# Allegro board INSOLADORA_SOLDERMASK_TOP.brd
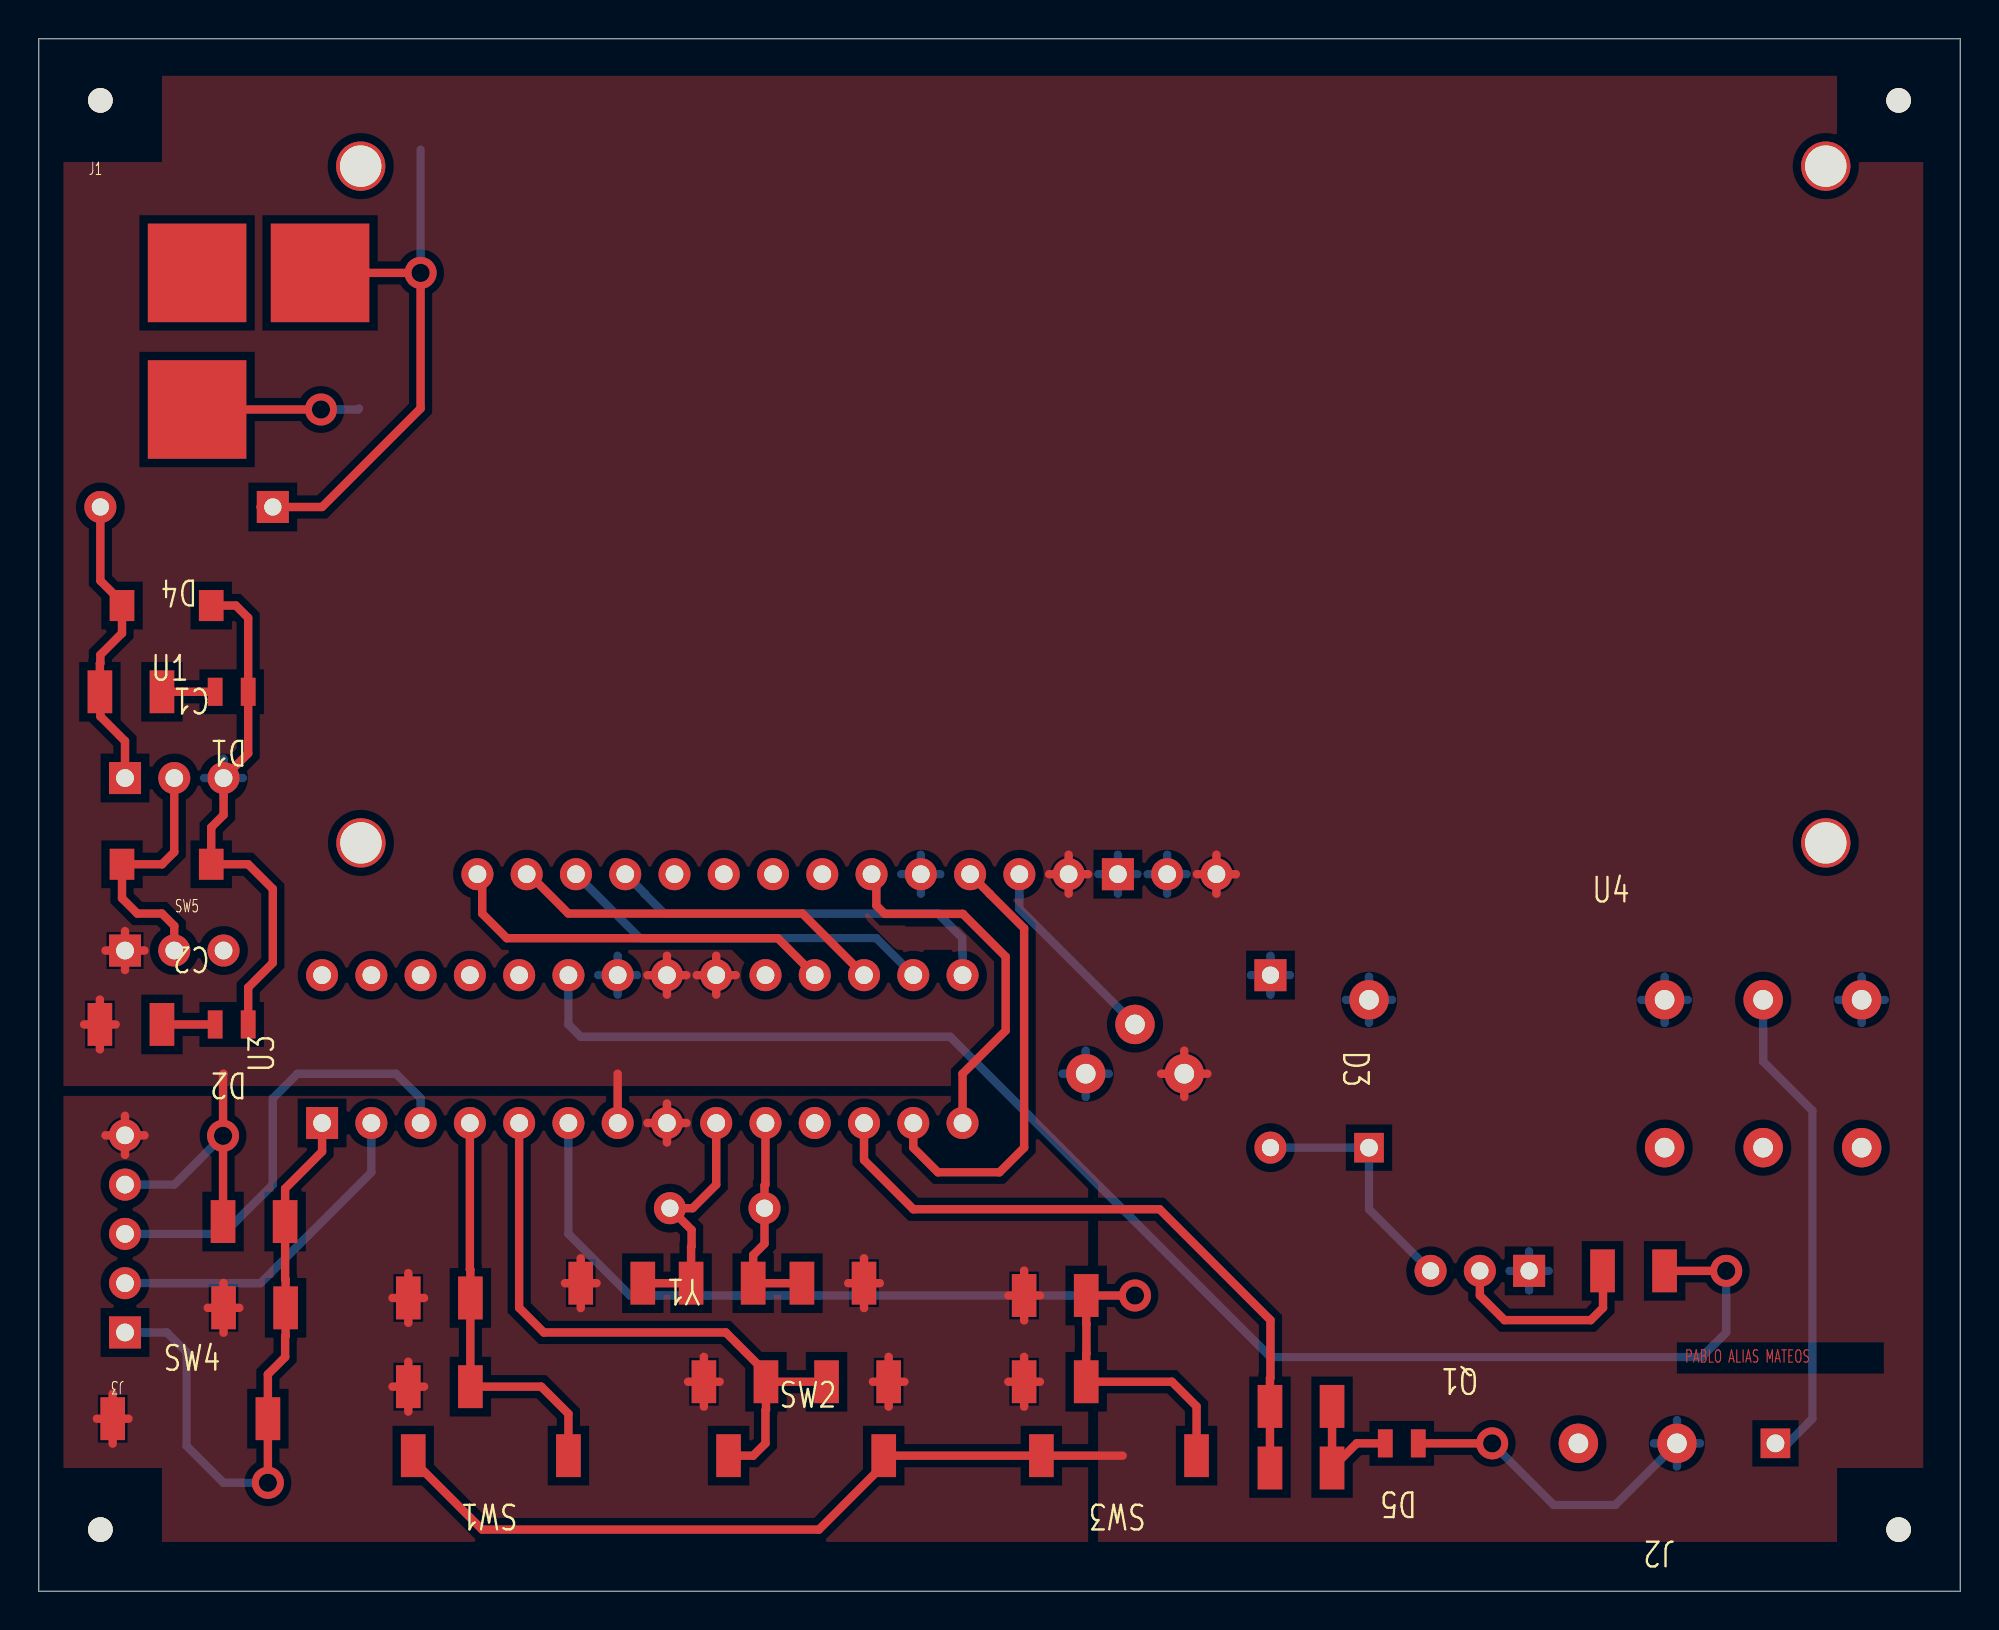
[diagram p0: board, top side]
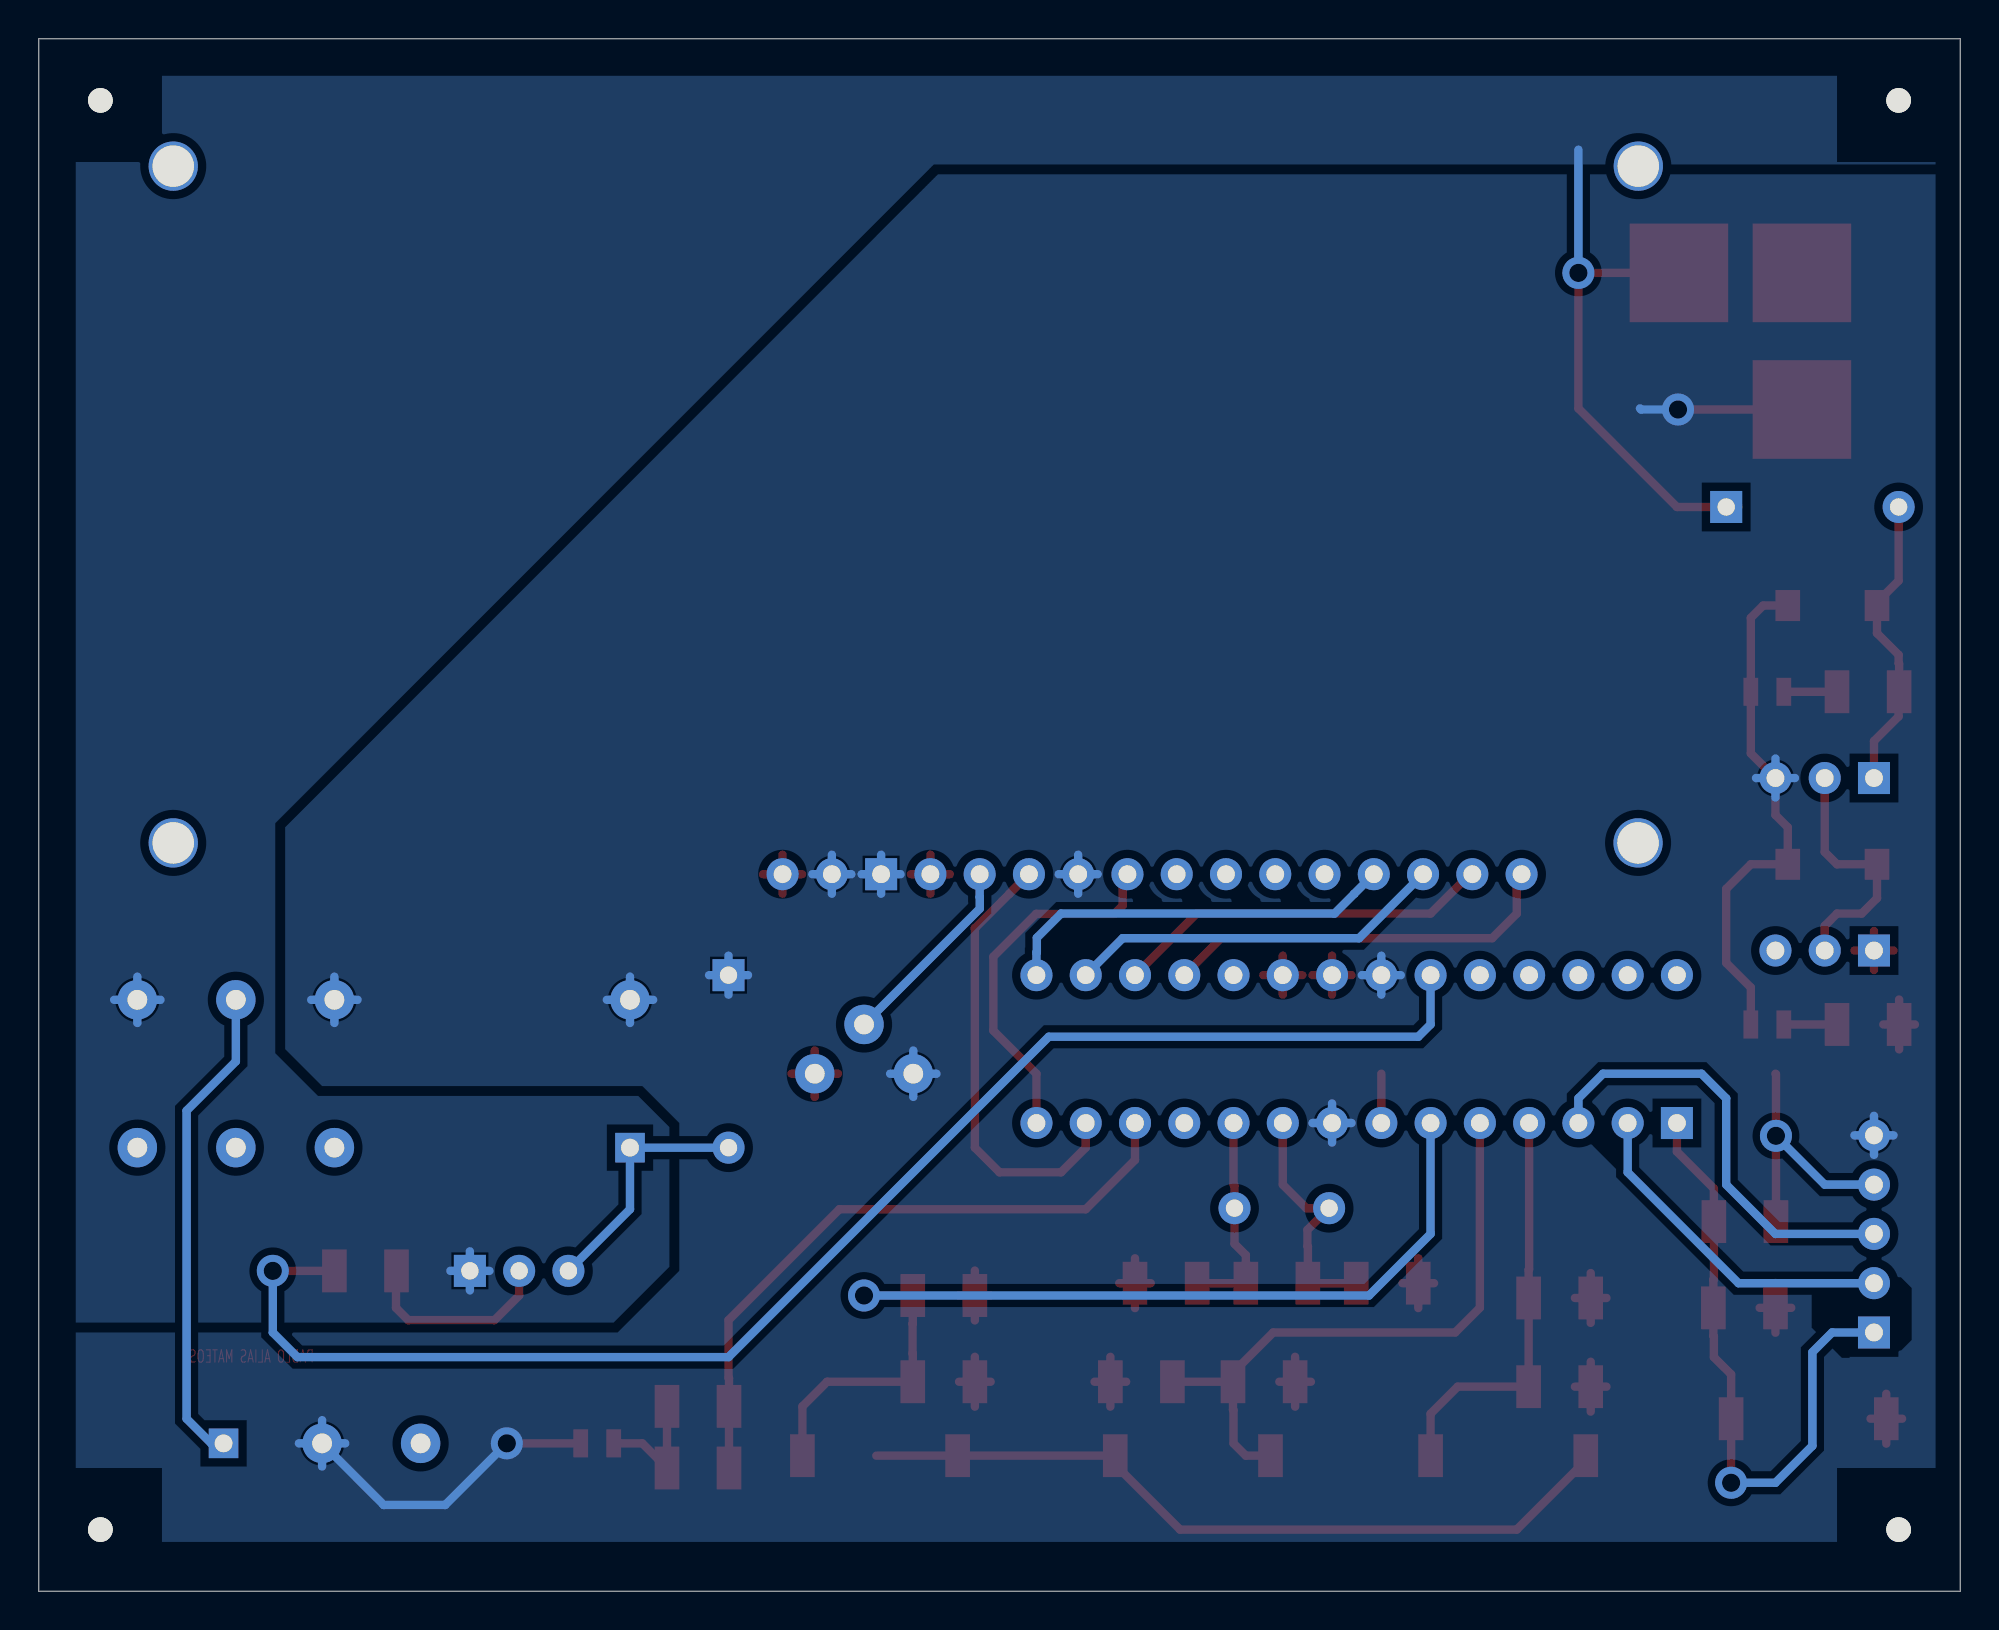
[diagram p1: board, bottom side, seen from below]

Outline 99.06 x 80.01 mm; copper layers: TOP, BOTTOM. Coordinates in mm from the lower left corner of the outline.
Outline path: 0,80.01 99.06,80.01 99.06,0 0,0 0,80.01

## Design rules (mm)
nets with their own width: min track width 0.432; nets POWER POWER_LEDS

## Placement (name value [footprint] x y rotation side)
C1  0.33u  [SMD_CAPHB]  8.89 50.8 180 top
C2  0.1u  [SMD_CAPHB]  8.89 37.47 180 top
C3  100n  [SMDCAP_126X63]  9.52 14.61 0 top
C4  100n  [SMDCAP_126X63]  19.05 10.54 0 top
C5  100n  [SMDCAP_126X63]  43.81 10.8 180 top
C6  100n  [SMDCAP_126X63]  50.8 15.24 0 top
C7  22p  [SMDCAP_126X63]  27.94 15.88 0 top
C8  22p  [SMDCAP_126X63]  42.55 15.88 180 top
D1  1N6266/TO  [SMDLED_67X35]  10.8 46.36 180 top
D2  1N6266/TO  [SMDLED_67X35]  10.8 29.21 180 top
D3  d  [DIODO_350]  63.5 31.75 270 top
D4  d  [DIODO_350]  12.06 55.88 180 top
D5  1N6266/TO  [SMDLED_67X35]  71.12 7.62 180 top
J1  POWER  [JACK_HEMBRA_INSOLADORA]  -2.54 67.95 0 top
J2  LEDS_UV  [CON3]  89.53 7.62 180 top
J3  CON5  [CON_1X5]  4.45 13.34 180 top
NOREF  -  [unnamed]  95.88 76.84 0 top
NOREF#2  -  [unnamed]  3.18 76.84 0 top
NOREF#3  -  [unnamed]  95.88 3.18 0 top
NOREF#4  -  [unnamed]  3.18 3.18 0 top
Q1  -  [BC547B]  76.84 16.51 180 top
R1  1k  [SMDRES_126X63]  6.35 29.21 180 top
R2  1k  [SMDRES_126X63]  6.35 46.36 180 top
R3  10k  [POT_MULTI]  53.98 26.67 0 top
R4  10k  [SMDRES_126X63]  12.7 19.05 180 top
R5  220  [SMDRES_126X63]  19.05 15.11 0 top
R6  220  [SMDRES_126X63]  34.29 10.8 0 top
R7  220  [SMDRES_126X63]  50.8 10.8 0 top
R8  1k  [SMDRES_126X63]  36.83 15.88 180 top
R9  10k  [SMDRES_126X63]  83.82 16.51 180 top
R10  1k  [SMDRES_126X63]  66.67 9.53 180 top
R11  1k  [SMDRES_126X63]  66.67 6.35 180 top
SW1  SW PUSHBUTTON  [SMD_PUSHBUTTON]  27.3 6.98 180 top
SW2  SW PUSHBUTTON  [SMD_PUSHBUTTON]  35.56 6.98 0 top
SW3  SW PUSHBUTTON  [SMD_PUSHBUTTON]  59.69 6.98 180 top
SW4  SW PUSHBUTTON  [SMD_PUSHBUTTON]  3.81 8.89 0 top
SW5  SW MAG-SPDT  [INTERRUPTOR_INSOLADORA]  4.45 33.02 0 top
U1  LM7805C  [LM7805]  4.45 41.91 0 top
U2  LMB162H  [LMB162H_LCD]  12.45 77.6 0 top
U3  -  [ATMEGA328P]  14.61 24.13 90 top
U4  -  [RZ03_1C4_D005]  68.58 30.48 0 top
Y1  CRYSTAL 16 MHz  [CRISTAL16MHZ]  40.64 21.59 180 top

## Library data of the parts
C1 C2 = C_elect_0
C3-C8 = C
D1 D2 D5 = 1N6266/TO_0
D3 D4 = d_0
J1 J2 = CON3
J3 = CON5
Q1 = BC547B
R1 R2 R4-R11 = R
R3 = POT
SW1-SW4 = SW PUSHBUTTON
SW5 = SW MAG-SPDT
U1 = LM7805C
U2 = LMB162H_LCD_0
U3 = ATMEGA328P
U4 = RZ03_1C4_D005
Y1 = CRYSTAL

## Footprints (pads in the part's own frame, mm; a bottom-side part is the same pattern mirrored in y, then rotated)
ATMEGA328P
  rect 1.651x1.651 hole 0.914: 1(0,0)
  round 1.651 hole 0.914: 2(0,-2.54) 3(0,-5.08) 4(0,-7.62) 5(0,-10.16) 6(0,-12.7) 7(0,-15.24) 8(0,-17.78) 9(0,-20.32) 10(0,-22.86) 11(0,-25.4) 12(0,-27.94) 13(0,-30.48) 14(0,-33.02) 15(7.62,-33.02) 16(7.62,-30.48) 17(7.62,-27.94) 18(7.62,-25.4) 19(7.62,-22.86) 20(7.62,-20.32) 21(7.62,-17.78) 22(7.62,-15.24) 23(7.62,-12.7) 24(7.62,-10.16) 25(7.62,-7.62) 26(7.62,-5.08) 27(7.62,-2.54) 28(7.62,0)
BC547B
  rect 1.651x1.651 hole 0.889: 1(0,0)
  round 1.651 hole 0.889: 2(2.54,0) 3(5.08,0)
CON3
  rect 1.524x1.524 hole 0.914: 1(0,0)
  round 2.032 hole 1.016: 2(5.08,0) 3(10.16,0)
CON_1X5
  rect 1.651x1.651 hole 0.914: 1(0,0)
  round 1.651 hole 0.914: 2(0,-2.54) 3(0,-5.08) 4(0,-7.62) 5(0,-10.16)
CRISTAL16MHZ
  round 1.651 hole 0.889: 1(3.226,1.85) 2(8.103,1.85)
DIODO_350
  rect 1.651x1.651 hole 0.889: 1(0,0)
  round 1.651 hole 0.889: 2(8.89,0)
INTERRUPTOR_INSOLADORA
  rect 1.651x1.651 hole 0.914: 1(0,0)
  round 1.651 hole 0.914: 2(2.54,0) 3(5.08,0)
JACK_HEMBRA_INSOLADORA
  rect 5.08x5.08 smd: 1(17.041,0) 2(10.701,-7.041) 3(10.701,0)
LM7805
  rect 1.651x1.651 hole 0.914: 1(0,0)
  round 1.651 hole 0.914: 2(2.54,0) 3(5.08,0)
LMB162H_LCD
  round 2.54 hole 2.134: (4.15,-4.15) (4.163,-39.03) (79.683,-4.15) (79.683,-39.03)
  rect 1.651x1.651 hole 0.914: 1(43.188,-40.643)
  round 1.651 hole 0.914: 2(40.648,-40.643) 3(38.108,-40.643) 4(35.568,-40.643) 5(33.028,-40.643) 6(30.488,-40.643) 7(27.948,-40.643) 8(25.408,-40.643) 9(22.868,-40.643) 10(20.328,-40.643) 11(17.788,-40.643) 12(15.248,-40.643) 13(12.708,-40.643) 14(10.168,-40.643) 15(48.268,-40.643) 16(45.728,-40.643)
POT_MULTI
  round 2.032 hole 1.016: 1(0,0) 2(2.54,2.54) 3(5.08,0)
RZ03_1C4_D005
  rect 1.524x1.524 hole 0.914: 1(0,-7.62)
  round 2.032 hole 1.016: 2(15.24,-7.62) 3(20.32,-7.62) 4(25.4,-7.62) 5(25.4,0) 6(20.32,0) 7(15.24,0) 8(0,0)
SMD_CAPHB
  rect 1.27x1.6 smd: 1(0,0) 2(4.6,0)
SMD_PUSHBUTTON
  rect 1.27x2.21 smd: 1(0,0) 2(8.001,0)
SMDCAP_126X63
  rect 1.27x2.21 smd: 1(0,0) 2(3.2,0)
SMDLED_67X35
  rect 0.762x1.448 smd: 1(0,0) 2(1.702,0)
SMDRES_126X63
  rect 1.27x2.21 smd: 1(0,0) 2(3.2,0)
unnamed
  round 1.27 hole 3.962 unplated: (0,0)

## Nets
VCC: J3.4 R1.2 R3.3(2) R4.2 SW1.2 SW2.2 SW3.2 SW5.1(NC) U2.2(VDD) U2.15(BLK) U3.7(VCC) U3.20(AVCC) U3.21(AREF)
0: C1.1(-) C2.1(-) C3.1 C4.1 C5.1 C6.1 C7.1 C8.1 D1.1(CATHODE) D2.1(CATHODE) D3.1 D5.1(CATHODE) J1.2 J2.2 J3.5 R3.1 R5.1 R6.1 R7.1 SW4.1 U1.3(GND) U2.1(VSS) U2.5(R/W) U2.16(BLA) U3.8(GND1) U3.22(GND2) U4.7(12) U4.8(A2)
ATM_RSTN: C3.2 J3.1 R4.1 SW4.2 U3.1(PC6)
CONTRAST: R3.2(T) U2.3(VO)
DATA_EN: U2.6(E) U3.14(PB0)
DB4: U2.11(DB4) U3.15(PB1)
DB5: U2.12(DB5) U3.16(PB2)
DB6: U2.13(DB6) U3.17(PB3)
DB7: U2.14(DB7) U3.18(PB4)
MIN: C4.2 R5.2 SW1.1 U3.4(PD2)
POWER: D4.1 J1.1 Q1.1(C) U4.5(14)
POWER_LEDS: J2.1 U4.6(11)
PROG_LED: R10.2 R11.2 U3.12(PD6)
REG_SEL: U2.4(RS) U3.13(PD7)
RELAY_CNTRL: R9.1 U3.23(PC0)
RELAY_CURRENT: D3.2 Q1.3(E) U4.1(A1)
RX: J3.2 U3.2(PD0)
SEG: C5.2 R6.2 SW2.1 U3.5(PD3)
START: C6.2 R7.2 SW3.1 U3.6(PD4)
TX: J3.3 U3.3(PD1)
XTAL1: C7.2 R8.2 U3.9(PB6) Y1.2
XTAL2: C8.2 R8.1 U3.10(PB7) Y1.1
N408953: C2.2(+) SW5.2(COMMON) U1.2(OUT)
N409468: C1.2(+) D4.2 R2.2 U1.1(IN)
N416775: Q1.2(B) R9.2
N430607: D5.2(ANODE) R10.1 R11.1
N4105391: D2.2(ANODE) R1.1
N4184300: D1.2(ANODE) R2.1

Pads without a net: J1 3; J2 3; SW5 3; U2 7 8 9 10; U3 11 19 24 25 26 27 28; U4 2 3 4

## Via types
v1: diameter 1.651, hole 0.94, TOP to BOTTOM, 7 vias

## Routing (per net, layer and track width the routed paths; a pad name or vN(x,y) marks a point on that pad's centre or on a via; arc(x,y) is an arc through that point)
VCC: length 85.5
  TOP w0.432: U3.21 33.39,31.75 ; U3.21 32.39,32.75 ; U3.21 31.38,31.75 ; U3.21 32.39,30.75 ; SW5.1 4.45,34.02 ; SW5.1 5.45,33.02 ; SW5.1 4.45,32.02 ; SW5.1 3.44,33.02 ; U2.15 61.72,36.95 ; U2.15 60.71,35.95 ; U2.15 60.71,37.96 ; U2.15 59.71,36.95 ; R3.3 59.05,27.86 ; R3.3 59.05,25.48 ; R3.3 57.86,26.67 ; R3.3 60.25,26.67 ; 53.09,35.95 U2.2 ; U2.2 53.09,37.96 ; U2.2 52.09,36.95 ; U2.2 54.1,36.95 ; R1.2 3.96,29.21 ; R1.2 3.15,30.49 ; R1.2 2.34,29.21 ; R1.2 3.15,27.93 ; U3.20 35.93,31.75 ; U3.20 34.92,32.75 ; U3.20 33.92,31.75 ; U3.20 34.92,30.75 ; U3.7 29.85,26.67 ; 55.88,6.98 SW3.2 43.56,6.98 43.56,6.52 40.22,3.18 22.86,3.18 19.3,6.73 SW1.2 ; 9.52,26.67 9.5,26.64 v1(9.5,23.47) R4.2
  BOTTOM w0.432: J3.4 6.98,20.96 v1(9.5,23.47)
0: length 152.4
  TOP w0.432: SW4.1 3.81,10.17 ; SW4.1 3,8.89 ; SW4.1 3.81,7.61 ; SW4.1 4.62,8.89 ; 18.24,10.54 C4.1 ; C4.1 19.05,11.82 ; C4.1 19.86,10.54 ; C4.1 19.05,9.26 ; 33.48,10.8 R6.1 ; R6.1 34.29,9.51 ; R6.1 34.29,12.08 ; R6.1 35.1,10.8 ; J3.5 4.45,24.5 ; J3.5 4.45,22.49 ; J3.5 3.44,23.5 ; J3.5 5.45,23.5 ; 27.13,15.88 C7.1 ; C7.1 28.75,15.88 ; C7.1 27.94,14.59 ; C7.1 27.94,17.16 ; R7.1 50.8,12.08 ; R7.1 51.61,10.8 ; R7.1 50.8,9.51 ; R7.1 49.99,10.8 ; C3.1 10.34,14.61 ; C3.1 8.71,14.61 ; C3.1 9.52,15.89 ; C3.1 9.52,13.32 ; 41.73,15.88 C8.1 ; C8.1 42.55,14.59 ; C8.1 43.36,15.88 ; C8.1 42.55,17.16 ; C6.1 50.8,16.52 ; C6.1 51.61,15.24 ; C6.1 50.8,13.96 ; C6.1 49.99,15.24 ; D2.1 10.8,31.12 12.06,32.39 12.06,36.2 10.8,37.47 C2.1 8.89,39.37 9.52,40.01 U1.3 10.8,43.18 D1.1 10.8,50.17 10.16,50.8 C1.1 ; U3.8 32.39,25.13 ; U3.8 32.39,23.13 ; U3.8 33.39,24.13 ; U3.8 31.38,24.13 ; C5.1 44.63,10.8 ; C5.1 43.81,12.08 ; C5.1 43.81,9.51 ; C5.1 43,10.8 ; J1.2 v1(14.55,60.9) ; 19.05,13.83 R5.1 ; R5.1 19.05,16.4 ; R5.1 19.86,15.11 ; R5.1 18.24,15.11 ; D5.1 v1(74.93,7.62)
  BOTTOM w0.432: U2.5 45.47,37.96 ; U2.5 44.47,36.95 ; U2.5 45.47,35.95 ; U2.5 46.48,36.95 ; 32.39,23.13 U3.8 ; U3.8 31.38,24.13 ; U3.8 32.39,25.13 ; U3.8 33.39,24.13 ; U1.3 9.52,42.91 ; U1.3 10.53,41.91 ; U1.3 9.52,40.91 ; U1.3 8.52,41.91 ; U3.22 30.85,31.75 ; U3.22 29.85,30.75 ; U3.22 29.85,32.75 ; U3.22 28.84,31.75 ; U4.7 83.82,31.67 ; U4.7 82.63,30.48 ; U4.7 83.82,29.29 ; U4.7 85.01,30.48 ; 16.51,60.96 16.45,60.9 v1(14.55,60.9) ; R3.1 53.98,27.86 ; R3.1 55.17,26.67 ; R3.1 53.98,25.48 ; R3.1 52.78,26.67 ; D3.1 64.5,31.75 ; D3.1 63.5,30.75 ; D3.1 63.5,32.75 ; D3.1 62.5,31.75 ; 84.45,7.62 81.28,4.45 78.11,4.45 v1(74.93,7.62) ; 84.45,7.62 83.26,7.62 ; 84.45,7.62 84.45,8.81 ; 84.45,7.62 84.45,6.43 ; 84.45,7.62 85.65,7.62 ; 3.44,23.5 J3.5 ; J3.5 4.45,22.49 ; J3.5 4.45,24.5 ; J3.5 5.45,23.5 ; U4.8 69.77,30.48 ; U4.8 68.58,31.67 ; U4.8 67.39,30.48 ; U4.8 68.58,29.29 ; 55.63,35.95 U2.1 ; U2.1 56.64,36.95 ; U2.1 55.63,37.96 ; U2.1 54.63,36.95 ; U2.16 58.17,37.96 ; U2.16 58.17,35.95 ; U2.16 57.17,36.95 ; U2.16 59.18,36.95
ATM_RSTN: length 33.1
  TOP w0.432: U3.1 14.61,22.66 12.7,20.75 R4.1 12.7,16.08 12.73,16.05 C3.2 12.73,13.16 12.7,13.13 12.7,12.07 11.81,11.18 SW4.2 v1(11.81,5.59)
  BOTTOM w0.432: v1(11.81,5.59) 9.52,5.59 7.62,7.49 7.62,12.32 6.6,13.34 J3.1
CONTRAST: length 10.2
  BOTTOM w0.432: R3.2 50.55,35.18 50.55,35.78 50.55,35.79 U2.3
DATA_EN: length 19
  TOP w0.432: U3.14 47.62,26.67 49.85,28.89 49.85,32.7 47.64,34.91 43.61,34.91 43.18,35.34 43.18,36.71 U2.6
DB4: length 20.7
  BOTTOM w0.432: U3.15 47.62,32.92 47.61,32.94 47.61,33.67 46.35,34.93 32.26,34.93 31.24,35.94 31.24,35.95 U2.11
DB5: length 19.5
  BOTTOM w0.432: U2.12 30.99,33.66 43.18,33.66 U3.16
DB6: length 19.2
  TOP w0.432: U3.17 39.37,34.93 27.3,34.93 25.4,36.83
DB7: length 20.4
  TOP w0.432: U3.18 38.1,33.66 24.13,33.66 22.86,34.93 22.86,36.83
MIN: length 21.4
  TOP w0.432: U3.4 22.23,16.59 22.25,16.56 R5.2 C4.2 25.91,10.54 27.3,9.14 SW1.1
POWER: length 37.7
  TOP w0.432: 11.43,55.88 D4.1 14.61,55.88 19.69,60.96 v1(19.69,67.95) J1.1
  BOTTOM w0.432: v1(19.69,67.95) 19.69,74.3 ; U4.5 93.98,31.67 ; U4.5 95.17,30.48 ; U4.5 92.79,30.48 ; U4.5 93.98,29.29 ; 75.83,16.51 Q1.1 ; Q1.1 76.84,15.51 ; Q1.1 76.84,17.51 ; Q1.1 77.84,16.51
POWER_LEDS: length 25.1
  BOTTOM w0.432: J2.1 90.17,7.62 91.44,8.89 91.44,24.77 88.9,27.31 U4.6
PROG_LED: length 33.9
  TOP w0.432: R11.2 R10.2 63.47,10.97 63.5,11 63.5,13.97 57.79,19.69 45.09,19.69 42.55,22.23 U3.12
REG_SEL: length 23.3
  TOP w0.432: U2.4 49.02,35.95 49.02,35.94 50.8,34.16 50.8,22.86 49.53,21.59 46.36,21.59 45.09,22.86 U3.13
RELAY_CNTRL: length 76.2
  TOP w0.432: R9.1 v1(87,16.51)
  BOTTOM w0.432: 27.3,31.75 27.3,29.21 27.94,28.58 46.99,28.58 63.5,12.07 85.72,12.07 87,13.34 v1(87,16.51)
RELAY_CURRENT: length 12.7
  BOTTOM w0.432: Q1.3 68.58,19.69 U4.1 63.5,22.86
RX: length 17.6
  BOTTOM w0.432: U3.2 17.15,21.59 11.43,15.88 J3.2
SEG: length 32.6
  TOP w0.432: R6.2 37.49,11.26 35.42,13.34 26.04,13.34 24.77,14.61 U3.5 ; R6.2 37.49,9.35 37.47,9.32 37.47,7.62 36.83,6.98 SW2.1 ; R6.2 C5.2
START: length 52
  TOP w0.432: SW3.1 59.69,9.53 58.42,10.8 R7.2 54,12.24 54.01,12.26 54.01,13.78 54,13.79 C6.2 v1(56.52,15.24)
  BOTTOM w0.432: U3.6 27.3,18.42 30.48,15.24 v1(56.52,15.24)
TX: length 23.1
  BOTTOM w0.432: U3.3 19.69,25.4 18.42,26.67 13.34,26.67 12.06,25.4 12.06,20.96 9.52,18.42 J3.3
XTAL1: length 12.9
  TOP w0.432: C7.2 R8.2 33.63,17.75 33.66,17.78 33.66,18.62 Y1.2 33.71,19.74 34.92,20.96 U3.9
XTAL2: length 11
  TOP w0.432: U3.10 37.47,20.96 37.41,20.91 Y1.1 37.41,17.91 36.83,17.32 R8.1 C8.2
N408953: length 13.1
  TOP w0.432: U1.2 6.98,38.1 6.35,37.47 C2.2 4.29,35.71 5.08,34.93 6.35,34.93 6.98,34.29 SW5.2
N409468: length 15.4
  TOP w0.432: U1.1 4.45,43.82 3.18,45.09 3.18,46.33 R2.2 3.15,47.8 3.18,47.83 3.18,48.26 4.29,49.38 C1.2 4.29,50.97 3.18,52.08 D4.2
N416775: length 10.3
  TOP w0.432: R9.2 80.64,16.48 80.64,14.61 80.01,13.97 75.56,13.97 74.3,15.24 Q1.2
N430607: length 6.4
  TOP w0.432: R10.1 R11.1 67.94,7.62 D5.2
N4105391: length 2.7
  TOP w0.432: R1.1 D2.2
N4184300: length 2.7
  TOP w0.432: D1.2 R2.1

## Copper pours and planes (outline as drawn; the poured copper is in the pictures)
VCC on TOP: 54.61,2.54 54.61,20.96 49.53,26.04 1.27,26.04 1.27,78.1 97.15,78.1 97.15,26.04 97.16,2.54 ; 9 cut-outs
0 on TOP: 54.61,2.54 1.27,2.54 1.27,13.97 1.27,13.97 1.27,26.04 49.53,26.04 54.61,20.96 ; 1 cut-out
0 on BOTTOM: 2.54,2.54 1.27,2.54 1.27,73.03 52.7,73.03 86.36,39.37 86.36,27.94 84.45,26.04 67.94,26.04 66.04,24.13 66.04,16.51 69.22,13.34 97.16,13.34 97.16,2.54 96.52,2.54 ; 13 cut-outs
POWER on BOTTOM: 86.36,27.94 86.36,39.37 52.7,73.03 1.27,73.03 1.27,78.1 97.15,78.1 97.15,17.15 97.16,13.34 69.22,13.34 66.04,16.51 66.04,24.13 67.94,26.04 84.45,26.04

## Text on the board
TOP: PABLO ALIAS MATEOS
